# Altium PCB BEAGLEPLAYV020_220915.brd.PcbDoc (part 5 of 12)
Units mil, origin at the board's own origin, x right, y up, seen from the top; angles counter-clockwise.
Board outline 3149.7 x 3149.7 mil, 8 copper layers (TOP, LYR2_GND, LYR3, LAY4_PWR1, LAY5_PWR2, LAY6, LYR7_GND, BOTTOM), stack 60.84 mil thick; 782 components, 546 nets, 2864 pads, 2056 vias.
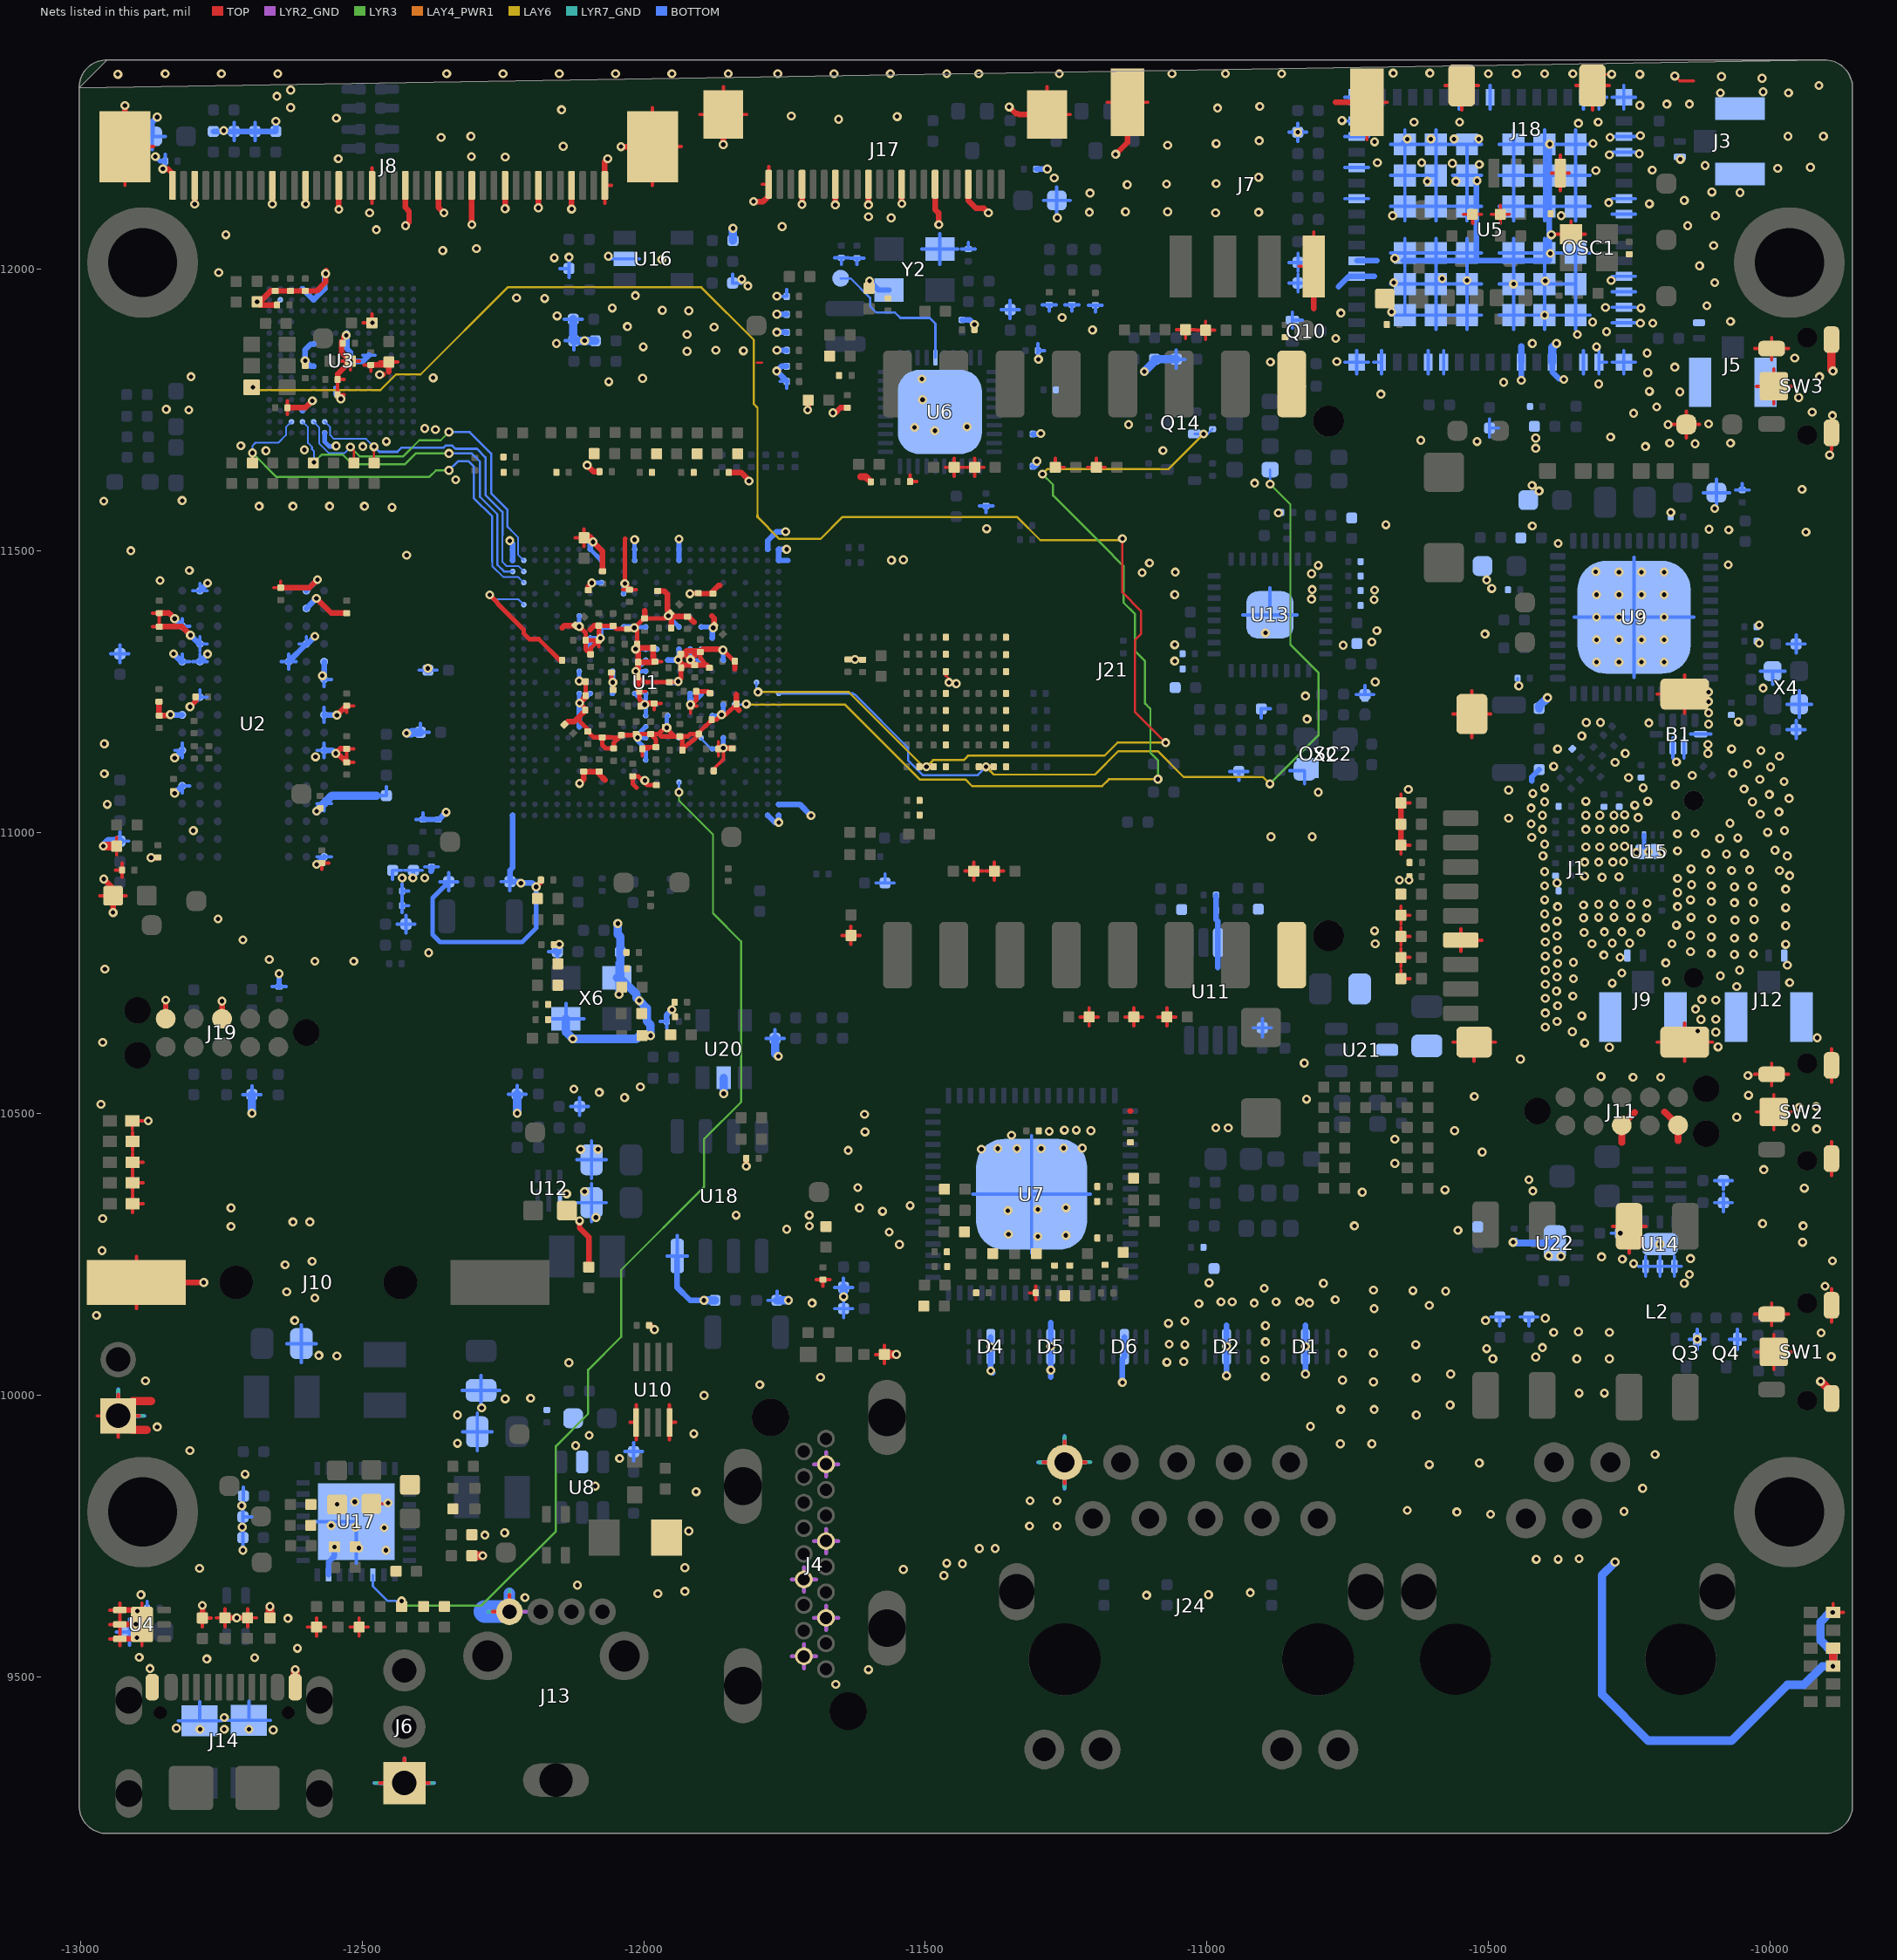
[diagram p11: the nets of this part, all layers, seen from the top]

## Via types
v1: diameter 16/0/16/0/0/0/0/16 (per signal layer), hole 8, TOP to BOTTOM, 334 vias
v2: diameter 16/16/0/0/0/0/16/16 (per signal layer), hole 8, TOP to BOTTOM, 282 vias
v3: diameter 16/0/0/0/0/16/0/16 (per signal layer), hole 8, TOP to BOTTOM, 255 vias
v4: diameter 16/16/0/0/0/16/16/16 (per signal layer), hole 8, TOP to BOTTOM, 253 vias
v5: diameter 16, hole 8, TOP to BOTTOM, 212 vias
v6: diameter 16/16/16/0/0/16/16/16 (per signal layer), hole 8, TOP to BOTTOM, 173 vias
v7: diameter 16/0/0/16/0/0/0/16 (per signal layer), hole 8, TOP to BOTTOM, 131 vias
v8: diameter 16/0/0/0/16/0/0/16 (per signal layer), hole 8, TOP to BOTTOM, 98 vias
v9: diameter 16/16/0/16/0/0/16/16 (per signal layer), hole 8, TOP to BOTTOM, 93 vias
v10: diameter 16/0/16/0/0/16/0/16 (per signal layer), hole 8, TOP to BOTTOM, 87 vias
v11: diameter 16/16/0/16/0/16/16/16 (per signal layer), hole 8, TOP to BOTTOM, 44 vias
v12: diameter 16/16/16/16/0/16/16/16 (per signal layer), hole 8, TOP to BOTTOM, 40 vias
v13: diameter 16/16/16/0/0/0/16/16 (per signal layer), hole 8, TOP to BOTTOM, 19 vias
v14: diameter 16/0/0/16/0/16/0/16 (per signal layer), hole 8, TOP to BOTTOM, 15 vias
v15: diameter 16/0/0/0/16/16/0/16 (per signal layer), hole 8, TOP to BOTTOM, 13 vias
v16: diameter 16/0/16/0/16/0/0/16 (per signal layer), hole 8, TOP to BOTTOM, 3 vias
v17: diameter 16/0/16/16/0/0/0/16 (per signal layer), hole 8, TOP to BOTTOM, 3 vias
v18: diameter 16/16/16/16/0/0/16/16 (per signal layer), hole 8, TOP to BOTTOM, 1 vias

## Nets (pads, with @x,y where several pads share a name; then routed paths per layer and width w, separated by ;. In a path a pad name is that pad's centre, name@x,y a point inside that pad or via, vN(x,y) a via of type N, cw(c..) or ccw(c..) an arc to the next point about the centre after c; other vN are vias at no path point) (continued)
EMMC_D4: R8.2 U1.AB2 U3.B3 | length 810.6
  TOP w4: v1(-12695,11673.7) -12694.86,11673.56 R8.2@-12694.86,11655.79
  LYR3 w3.8: v1(-12695,11673.7) -12652,11630.7 -12381,11630.7 -12369,11642.7 v1(-12346,11642.7)
  BOTTOM w3.2: v1(-12695,11673.7) -12695,11686.3 -12689.5,11691.8 -12649.07,11691.8 -12635.5,11705.37 -12635.5,11719.22 U3.B3@-12625.7,11729.02 ; -12269,11480.7 -12269,11472.7 -12249.46,11453.16 -12222.84,11453.16 U1.AB2@-12213.04,11443.36
  BOTTOM w4: v1(-12346,11642.7) -12330,11658.7 -12311,11658.7 -12302,11649.7 -12302,11593.7 -12269,11560.7 -12269,11480.7
EMMC_D5: R7.2 U1.AC1 U3.B4 | length 631.9
  TOP w4: R7.2@-12586.86,11655.79 v1(-12585.63,11657.02)
  LYR3 w3.8: v1(-12585.63,11657.02) -12574.5,11668.15 -12574.41,11668.15 -12571.76,11670.8 -12535,11670.8 -12517.9,11653.7 -12424,11653.7 -12405,11672.7 v1(-12346,11672.7)
  BOTTOM w3.2: U3.B4@-12606.02,11729.02 -12596.22,11719.22 -12596.22,11691.21 -12589.2,11684.19 -12589.2,11680.21 -12585.63,11676.64 v1(-12585.63,11657.02)
  BOTTOM w4: v1(-12346,11672.7) -12305.5,11672.7 -12291,11658.2 -12291,11595.7 -12260,11564.7 -12260,11474.7 -12248.35,11463.05 U1.AC1@-12232.72,11463.05
EMMC_D6: R6.2 U1.AD2 U3.B5 | length 644.8
  TOP w4: v1(-12521,11684) -12514.86,11677.86 R6.2@-12514.86,11655.79
  LYR3 w3.8: v1(-12521,11684) -12504.7,11667.7 -12427,11667.7 -12398.7,11696 -12360.7,11696 v1(-12346,11710.7)
  BOTTOM w3.2: U3.B5@-12586.33,11729.02 -12576.53,11719.22 -12576.53,11690.78 -12558.75,11673 -12532,11673 v1(-12521,11684) ; -12236,11536.7 -12222.92,11523.62 -12222.92,11492.62 U1.AD2@-12213.04,11482.74
  BOTTOM w4: v1(-12346,11710.7) -12309,11710.7 -12271,11672.7 -12271,11601.7 -12242,11572.7 -12242,11542.7 -12236,11536.7
EMMC_D7: R5.2 U1.AC2 U3.B6 | length 601.8
  TOP w4: v5(-12479,11684.7) -12478.58,11684.28 -12478.58,11678.62 -12478.86,11678.34 R5.2@-12478.86,11655.79
  BOTTOM w3.2: U3.B6@-12566.65,11729.02 -12556.85,11719.22 -12556.85,11705.37 -12550.18,11698.7 -12493,11698.7 v5(-12479,11684.7) ; -12251,11527.7 -12251,11479.7 -12244.15,11472.85 -12222.84,11472.85 U1.AC2@-12213.04,11463.05
  BOTTOM w4: v5(-12479,11684.7) -12469.8,11675.5 -12437.51,11675.5 -12430.01,11683 -12355.5,11683 -12351.8,11686.7 -12340.2,11686.7 -12334.5,11681 -12296.3,11681 -12281,11665.7 -12281,11598.7 -12251,11568.7 -12251,11527.7
EMMC_RSTN: D56.2 R182.2 R199.1 U1.N23 | length 3267.8
  TOP w4: D56.2@-12696.48,11790 v3(-12694,11790) ; R182.2@-11510.9,11116.36 v3(-11498,11116.36) R199.1@-11485.4,11116.36 ; v3(-11150,11521.56) -11150,11426 -11117,11393 -11117,11352 -11128,11341 -11128,11214.2 v3(-11073,11159.2)
  LAY6 w3.8: v3(-12694,11790) -12689.14,11785.14 -12467.86,11785.14 -12440,11813 -12396.31,11813 -12241.61,11967.7 -11897.74,11967.7 -11804.52,11874.48 -11804.52,11760.52 -11798,11754 -11798,11562.7 ; -11697,11249 -11635.68,11249 -11504.03,11117.35 -11499.34,11117.35 -11498.35,11116.36 v3(-11498,11116.36) -11486.2,11128.16 -11431.84,11128.16 -11424,11136 -11181.89,11136 -11158.69,11159.2 v3(-11073,11159.2) ; -11697,11521 -11686,11521 -11647,11560 -11337,11560 -11295.8,11518.8 -11152.76,11518.8 v3(-11150,11521.56)
  LAY6 w4: -11798,11562.7 -11798,11560 -11759,11521 -11697,11521 ; v3(-11797,11249) -11697,11249
  BOTTOM w4: U1.N23@-11799.65,11266.2 -11799.65,11251.65 v3(-11797,11249)
EXTINTN: R160.2 U1.D16 U17.11 | length 1936
  TOP w4: R160.2@-12430,9625.21 v1(-12430,9635)
  LYR3 w3.8: v1(-12430,9635) -12422,9627 -12288,9627 -12156,9759 -12156,9909.96 -12098.6,9967.36 -12098.6,10045.4 -12040,10104 -12040,10223 -11893,10370 -11893,10455 -11827,10521 -11827,10806 -11877,10856 -11877,10996 -11937.44,11056.44 v1(-11937.44,11070.95)
  BOTTOM w4: U17.11@-12481.16,9681.31 -12481.16,9661.16 -12455,9635 v1(-12430,9635) ; v1(-11937.44,11070.95) U1.D16@-11937.44,11089.04
GBE_CLKO: TP8.1 U6.35 | length 270.6
  BOTTOM w4: TP8.1@-11650.32,11983.65 -11632.65,11983.65 -11598,11949 -11598,11934 -11587,11923 -11554,11923 -11544.34,11913.34 -11492.34,11913.34 -11482,11903 U6.35@-11482,11842.88
GBE_INTN: Q14.2 R259.2 U1.L21 | length 1795.8
  LYR3 w3.8: v10(-11292,11636) -11273,11617 -11273,11598.02 -11184.6,11509.62 -11184.6,11509.53 -11148,11472.93 -11148,11408 -11128,11388 -11128,11322.2 -11109.6,11303.8 -11109.6,11228.52 -11102.95,11221.86 -11100.2,11219.11 -11100.2,11141.3 -11086.9,11128 v10(-11086.9,11094.43)
  LAY6 w3.8: -11697,11227 -11643.04,11227 -11509.7,11093.66 -11428.66,11093.66 -11417,11082 -11186,11082 -11173.91,11094.09 -11087.91,11094.09 -11087.57,11094.43 v10(-11086.9,11094.43) ; v10(-11292,11636) -11282.75,11645.25 -11067.75,11645.25 v3(-11005.69,11707.31)
  LAY6 w4: v3(-11818,11227.7) -11817.3,11227 -11697,11227
  BOTTOM w4: U1.L21@-11839.02,11226.83 -11818.87,11226.83 v3(-11818,11227.7) ; Q14.2@-11021.74,11707.31 v3(-11005.69,11707.31) -10998.54,11707.31 R259.2@-10989.85,11716
GBE_RSTN: D32.2 R183.2 R200.1 U1.M25 | length 1654
  TOP w4: R183.2@-11404.96,11116.36 -11397.36,11116.36 -11397.15,11116.15 v3(-11392.15,11116.15) -11388.85,11116.15 -11388.64,11116.36 R200.1@-11378.7,11116.36
  LYR3 w3.8: v10(-10887.96,11086.04) -10802,11172 -10802,11283.57 -10851.6,11333.22 -10851.6,11582.17 v1(-10887.65,11618.22)
  LAY6 w3.8: v3(-11392.15,11116.15) -11388,11112 -11387.64,11112 -11378.1,11102.46 -11198.74,11102.46 -11157.2,11144 -11087,11144 -11041,11098 -10900,11098 v10(-10887.96,11086.04) v10(-10887.96,11086.04)
  BOTTOM w4: U1.M25@-11760.28,11246.52 -11628.52,11246.52 -11626.63,11244.63 -11625.23,11244.63 -11530.66,11150.06 -11530.66,11127.8 -11504.22,11101.36 -11406.94,11101.36 v3(-11392.15,11116.15) ; v1(-10887.65,11618.22) D32.2@-10887.65,11644
GND: B1.2 B1.3 B1.10 C2.2 C3.2 C4.2 C5.2 C6.2 C7.2 C8.2 C9.2 C10.2 C11.2 C16.2 C17.2 C18.2 C20.2 C22.2 C23.2 C24.2 C29.2 C30.2 C31.2 C32.2 C33.2 C34.2 C35.2 C36.2 C37.2 C38.2 C39.2 C40.2 C41.2 C42.2 C43.2 C44.2 C46.2 C47.2 C48.2 C49.2 C50.2 C51.2 C52.2 C53.2 C54.2 C55.2 C56.2 C57.2 C58.2 C59.2 C60.2 C61.2 C62.2 C63.2 C64.2 C65.2 C66.2 C67.2 C68.2 C69.2 C70.2 C71.2 C72.2 C73.2 C74.2 C75.2 C76.2 C77.2 C78.2 C79.2 C80.2 C81.2 C83.2 C84.2 C85.2 C86.2 C87.2 C88.2 C89.2 C90.1 C91.2 C92.2 C93.2 C94.2 C95.2 C96.2 C99.2 C100.2 C101.2 C102.2 C103.2 C104.2 C105.1 C107.2 C108.2 C109.2 C110.2 C111.2 C112.2 C113.2 C114.2 C115.2 C116.2 C117.2 C118.2 C119.2 C120.2 C122.2 C123.2 C124.2 C125.2 C126.2 C127.2 C128.2 C129.2 C130.2 C131.2 C132.2 C133.2 C134.2 C135.2 C136.2 C137.2 C138.2 C139.2 C140.2 C141.2 C142.2 C143.2 C144.2 C145.2 C146.2 C147.2 C148.2 C149.2 C150.2 C151.2 C152.2 C153.2 C154.2 C155.2 C156.2 C157.2 C158.2 C159.2 C160.2 C161.2 C162.2 C163.2 C164.2 C165.2 C166.2 C167.2 C168.2 C169.2 C170.2 C171.2 C172.2 C173.2 C174.2 C175.2 C176.2 C177.2 C178.2 C179.2 C180.2 C181.2 C182.2 C183.2 C184.2 C185.2 C186.2 C187.2 C188.2 C189.2 C190.2 C191.2 C192.2 C193.2 C194.2 C195.2 C196.2 C197.2 C198.2 C199.2 C200.2 C201.2 C202.2 C203.2 C204.2 C205.2 C206.2 C207.2 C208.2 C209.2 C210.2 C211.2 C212.2 C213.2 C214.2 C215.2 C216.2 C217.2 C218.2 C219.2 C220.2 C221.2 C222.2 C223.2 C224.2 C225.2 C226.2 C227.2 C228.2 C229.2 C230.2 C231.2 C232.2 C233.2 C234.2 C235.2 C236.2 C237.2 C238.2 C239.2 C240.2 C241.2 C242.2 C243.2 C244.2 C245.2 C247.2 C248.2 C249.2 C250.2 C251.2 C252.2 C253.2 C254.2 C255.2 C258.2 C259.2 C260.2 C261.2 C262.2 C263.2 C264.2 C265.2 C266.2 C267.2 C268.2 C269.2 C270.2 C271.2 C272.2 C273.2 C274.2 C275.2 C276.2 C294.2 C295.2 C296.2 C297.2 C298.2 C299.2 C300.2 D1.3 D1.8 D2.3 D2.8 D4.3 D4.8 D5.3 D5.8 D6.3 D6.8 D7.1 D8.1 D9.1 D10.1 D13.1 D14.1 D15.1 D16.1 D17.1 D18.1 D19.1 D20.1 D24.1 D25.1 D26.1 D27.1 D28.1 D29.1 D30.1 D31.1 D36.1 D37.1 D38.1 D39.1 D40.1 D41.1 D42.1 D43.1 D44.1 D45.1 D52.1 D73.1 D74.1 J1.6 J1.10 J1.11 J1.12 J1.13 J3.2 J3.3 J4.2 J4.5 J4.8 J4.11 J4.17 J5.2 J5.3 J6.1 J7.4 J7.5 J7.6 J8.1 J8.4 J8.7 J8.10 J8.13 J8.16 J8.19 J8.22 J8.25 J8.28 J8.31 J8.38 J8.40 J8.41 J8.42 J9.2 J9.3 J10.1 J11.3 J11.5 J12.2 J12.3 J13.4 J14.B1 J14.B12 J16.1 J17.1 J17.4 J17.7 J17.10 J17.13 J17.16 J17.19 J17.23 J17.24 J18.1 J18.5 J18.6 J19.3 J19.5 J21.1 J21.16 J24.1 L2.2 L12.1 LED3.2 LED4.2 LED5.2 LED6.2 LED7.2 LED8.2 LED9.2 LED11.2 OSC1.2 OSC2.2 Q3.2 Q4.2 Q10.2 R1.2 R15.2 R17.2 R20.2 R22.2 R28.2 R29.2 R33.2 R38.1 R41.1 R43.1 R45.1 R47.1 R55.2 R56.2 R59.2 R61.1 R66.2 R82.2 R83.2 R85.2 R87.2 R88.1 R89.2 R91.2 R93.2 R94.1 R124.2 R128.2 R129.2 R130.2 R131.2 R141.2 R147.2 R152.2 R153.2 R158.2 R187.2 R188.2 R189.2 R190.2 R191.2 R192.2 R193.2 R194.2 R195.2 R196.2 R197.2 R198.2 R199.2 R200.2 R212.2 R213.2 R215.2 R218.2 R220.2 R240.2 R241.2 R242.2 R243.2 R249.1 R251.2 R253.1 R256.2 R261.2 R272.2 R276.2 R277.2 R278.2 R308.1 R310.1 SW1.1 SW1.S1 SW1.S2 SW1.S3 SW2.1 SW2.S1 SW2.S2 SW2.S3 SW3.1 SW3.S1 SW3.S2 SW3.S3 TP28.1 U1.A1 U1.A24 U1.A25 U1.AA11 U1.AB9 U1.AD1 U1.AD9 U1.AD12 U1.AD16 U1.AD25 U1.AE1 U1.AE8 U1.AE12 U1.AE16 U1.AE24 U1.AE25 U1.B25 U1.F13 U1.G13 U1.G19 U1.H13 U1.H16 U1.H18 U1.H20 U1.J7 U1.J13 U1.K7 U1.K13 U1.K15 U1.K19 U1.L20 U1.M7 U1.M8 U1.M10 U1.M12 U1.M13 U1.M17 U1.M18 U1.N15 U1.P7 U1.P10 U1.P13 U1.R13 U1.R15 U1.R18 U1.R20 U1.T8 U1.T13 U1.T14 U1.T16 U1.T17 U1.T18 U1.U8 U1.U19 U1.V9 U1.V10 U1.V11 U1.V13 U1.V16 U1.V18 U1.W7 U1.Y2 U2.A2 U2.A8 U2.B2 U2.C9 U2.D2 U2.D8 U2.E1 U2.E3 U2.E8 U2.E9 U2.F1 U2.G8 U2.H1 U2.H9 U2.K1 U2.K9 U2.M9 U2.N1 U2.T1 U3.A6 U3.C4 U3.E7 U3.G5 U3.H10 U3.J5 U3.K8 U3.N2 U3.N5 U3.P4 U3.P6 U4.1 U4.2 U4.3 U4.7 U5.1 U5.7 U5.9 U5.15 U5.16 U5.17 U5.19 U5.20 U5.23 U5.24 U5.28 U5.29 U5.30 U5.31 U5.33 U5.34 U5.35 U5.37 U5.39 U5.44 U5.45 U5.48 U5.49 U5.54 U5.55 U5.59 U5.61 U5.63 U5.64 U5.G1 U5.G2 U5.G3 U5.G4 U5.G5 U5.G6 U5.G7 U5.G8 U5.G9 U5.G10 U5.G11 U5.G12 U5.G13 U5.G14 U5.G15 U5.G16 U5.G17 U5.G18 U5.G19 U5.G20 U5.G21 U5.G22 U5.G23 U5.G24 U5.G25 U5.G26 U5.G27 U5.G28 U5.G29 U5.G30 U5.G31 U5.G32 U5.G33 U5.G34 U5.G35 U5.G36 U6.41 U7.65 U8.2 U9.49 U10.1 U10.4 U11.3 U12.4 U13.33 U14.1 U14.2 U14.3 U14.7 U15.6 U15.9 U16.2 U17.15 U17.33 U18.4 U20.2 U21.2 U22.5 U22.7 X2.2 X4.2 X4.4 X6.2 X6.4 Y2.2 Y2.4 | length 33060.3
  TOP w4: C63.2@-12483.66,9807.5 -12459.5,9807.5 -12458,9809 v2(-12454.16,9809) ; -11799,11834 -11789.61,11834 ; -11463.4,11278.4 -11459,11274 -11459,11266.9 v2(-11458.1,11266) ; J18.5@-10300.83,12326.17 -10300.83,12338.17 -10293,12346 v4(-10281,12346) ; v4(-10169,12343) -10160.31,12334.31
  TOP w6: -12970.86,9963.66 J16.1@-12933.34,9963.66 ; -12966.06,10887.36 C109.2@-12942.54,10887.36 -12919.02,10887.36 ; -12948.34,9567.57 U4.3@-12930.51,9567.57 ; -12948.34,9593.16 U4.2@-12930.51,9593.16 ; -12948.34,9618.75 U4.1@-12930.51,9618.75 ; -12937.98,10932.84 C101.2@-12926.46,10932.84 ; -12936.09,10959.49 C80.2@-12936.09,10975.36 -12936.09,10991.23 ; -12933.34,9926.14 J16.1@-12933.34,9963.66 ; -12933.34,10001.18 J16.1@-12933.34,9963.66 ; -12930.51,9555.64 U4.3@-12930.51,9567.57 ; -12930.51,9579.5 U4.3@-12930.51,9567.57 ; -12930.51,9581.23 U4.2@-12930.51,9593.16 ; -12930.51,9605.09 U4.2@-12930.51,9593.16 ; -12930.51,9606.82 U4.1@-12930.51,9618.75 ; -12930.51,9630.68 U4.1@-12930.51,9618.75 ; -12926.46,10920.57 C101.2@-12926.46,10932.84 ; -12926.46,10945.11 C101.2@-12926.46,10932.84 ; -12921.5,12148.44 J8.42@-12921.5,12217.45 -12870.2,12217.45 ; -12908.18,10471.54 LED3.2@-12908.18,10487.56 -12889.66,10487.56 ; -12907.88,10324.54 LED7.2@-12907.88,10340.56 ; -12907.88,10356.58 LED7.2@-12907.88,10340.56 ; -12907.88,10361.54 LED6.2@-12907.88,10377.56 ; -12907.88,10393.58 LED6.2@-12907.88,10377.56 ; -12907.88,10397.84 LED5.2@-12907.88,10413.86 ; -12907.88,10429.88 LED5.2@-12907.88,10413.86 ; -12907.88,10434.84 LED4.2@-12907.88,10450.86 -12907.88,10466.88 ; -12900.99,10154.59 J10.1@-12900.99,10200.61 -12900.99,10246.63 ; -12895.82,9963.66 J16.1@-12933.34,9963.66 ; -12891.14,9555.64 U4.7@-12891.14,9593.16 -12891.14,9630.68 ; -12889.36,10340.56 LED7.2@-12907.88,10340.56 ; -12889.36,10377.56 LED6.2@-12907.88,10377.56 ; -12889.36,10413.86 LED5.2@-12907.88,10413.86 ; -12872.61,11365.2 C81.2@-12860.34,11365.2 -12860.34,11376.72 ; -12872.61,11389.24 C102.2@-12860.34,11389.24 -12860.34,11377.72 ; -12783.86,9588.86 R129.2@-12783.86,9604.73 -12767.99,9604.73 ; -12759.53,9604.93 D25.1@-12743.66,9604.93 ; -12743.66,9589.06 D25.1@-12743.66,9604.93 ; -12743.66,9620.8 D25.1@-12743.66,9604.93 ; -12703.66,9589.1 D24.1@-12703.66,9604.97 ; -12703.66,9620.84 D24.1@-12703.66,9604.97 ; -12687.79,9604.97 D24.1@-12703.66,9604.97 ; -12657.13,11434.32 C114.2@-12644.86,11434.32 -12644.86,11445.84 ; -12632.84,11741.77 C76.2@-12632.84,11754.04 -12632.84,11766.31 ; -12597.01,9588.67 R215.2@-12581.14,9588.67 ; -12581.14,9572.8 R215.2@-12581.14,9588.67 ; -12581.14,9604.54 R215.2@-12581.14,9588.67 ; -12571.66,10933.98 C117.2@-12571.66,10945.5 -12559.39,10945.5 ; -12565.27,9588.67 R215.2@-12581.14,9588.67 ; -12543.72,11789.31 C73.2@-12543.72,11777.04 -12532.2,11777.04 ; -12543.56,11791.77 C68.2@-12543.56,11804.04 -12532.04,11804.04 ; -12536.78,11836.56 v2(-12520.91,11836.56) ; -12534.86,11856.09 C65.2@-12534.86,11868.36 v2@-12534.86,11880.63 ; -12527.66,11135.92 C99.2@-12527.66,11124.4 -12515.39,11124.4 ; -12527.66,11136.88 C120.2@-12527.66,11148.4 -12515.39,11148.4 ; -12527.66,11212.98 C116.2@-12527.66,11224.5 -12515.39,11224.5 ; -12521.37,9588.71 R55.2@-12505.5,9588.71 ; -12520.91,11820.69 v2(-12520.91,11836.56) ; -12505.5,9572.84 R55.2@-12505.5,9588.71 ; -12505.5,9604.58 R55.2@-12505.5,9588.71 ; -12505.04,11836.56 v2(-12520.91,11836.56) ; -12498.62,11904.56 R20.2@-12482.75,11904.56 -12482.75,11920.43 ; -12496.93,11829.88 C66.2@-12484.66,11829.88 -12484.66,11818.36 ; -12489.63,9588.71 R55.2@-12505.5,9588.71 ; -12482.53,12116.94 J8.22@-12482.53,12148.55 -12482.53,12180.16 ; -12468.6,9311.76 J6.1@-12425.08,9311.76 ; -12468.53,11834.99 C69.2@-12452.66,11834.99 -12436.79,11834.99 ; -12425.08,9355.28 J6.1@-12425.08,9311.76 ; -12381.56,9311.76 J6.1@-12425.08,9311.76 ; -12268.32,9616 J13.4@-12238.68,9616 -12238.68,9645.64 ; -12121.87,11522.91 R130.2@-12106,11522.91 ; -12106,11507.04 R130.2@-12106,11522.91 ; -12106,11538.78 R130.2@-12106,11522.91 ; -12091.3,11341.36 C156.2@-12079.78,11341.36 -12079.78,11329.09 ; -12069.14,12116.94 J8.1@-12069.14,12148.55 -12057.21,12148.55 ; -12037.61,11430.85 C208.2@-12025.34,11430.85 -12013.07,11430.85 ; -12024.4,9952.16 U10.1@-12013.38,9952.16 ; -12013.38,9921.14 U10.1@-12013.38,9952.16 ; -12013.38,9983.18 U10.1@-12013.38,9952.16 ; -12007.85,11262.31 C187.2@-12007.85,11250.04 -11996.33,11250.04 ; -12002.3,11135.77 C137.2@-12002.3,11148.04 -11990.78,11148.04 ; -11992.61,11302.85 C176.2@-11980.34,11302.85 ; -11984.5,12148.44 J8.41@-11984.5,12217.45 ; -11984.5,12286.46 J8.41@-11984.5,12217.45 ; -11981.66,11217.36 C162.2@-11981.66,11228.88 -11969.39,11228.88 ; -11980.34,11314.37 C176.2@-11980.34,11302.85 ; -11968.07,11302.85 C176.2@-11980.34,11302.85 ; -11954.38,9921.14 U10.4@-11954.38,9952.16 ; -11954.38,9983.18 U10.4@-11954.38,9952.16 ; -11943.36,9952.16 U10.4@-11954.38,9952.16 ; -11933.2,12217.45 J8.41@-11984.5,12217.45 ; -11916.85,11211.77 C188.2@-11916.85,11224.04 -11905.33,11224.04 ; v2@-11915.61,11424.4 C142.2@-11903.34,11424.4 -11891.07,11424.4 ; -11900.16,12274.63 J17.24@-11858.7,12274.63 ; C154.2@-11875.85,11109.04 -11875.85,11112.34 -11858.7,11129.49 v2(-11858.7,11149.61) ; -11867.3,11135.77 C139.2@-11867.3,11148.04 -11867.3,11160.31 ; -11858.7,12323.96 J17.24@-11858.7,12274.63 ; -11817.24,12274.63 J17.24@-11858.7,12274.63 ; -11789.92,12150.73 J17.1@-11777.99,12150.73 -11777.99,12182.34 ; -11693.93,10205.5 C245.2@-11681.66,10205.5 ; -11681.66,10193.98 C245.2@-11681.66,10205.5 ; -11669.39,10205.5 C245.2@-11681.66,10205.5 ; -11647.87,10816.79 D31.1@-11632,10816.79 ; -11632,10800.92 D31.1@-11632,10816.79 ; -11632,10832.66 D31.1@-11632,10816.79 ; -11616.13,10816.79 D31.1@-11632,10816.79 ; -11588.41,10072.66 D7.1@-11572.54,10072.66 ; -11572.54,10056.79 D7.1@-11572.54,10072.66 ; -11572.54,10088.53 D7.1@-11572.54,10072.66 ; -11527.13,11634.88 C94.2@-11527.13,11622.61 -11515.61,11622.61 ; -11464.45,11648 D36.1@-11448.58,11648 ; -11463.4,11278.4 R189.2@-11463.4,11285.3 ; -11448.58,11632.13 D36.1@-11448.58,11648 ; -11448.58,11663.87 D36.1@-11448.58,11648 ; -11432.71,11648 D36.1@-11448.58,11648 ; -11429.66,10931 D45.1@-11413.79,10931 ; -11428.08,11648 D37.1@-11412.21,11648 ; -11413.79,10915.13 D45.1@-11413.79,10931 ; -11413.79,10946.87 D45.1@-11413.79,10931 ; -11412.21,11632.13 D37.1@-11412.21,11648 ; -11412.21,11663.87 D37.1@-11412.21,11648 ; -11397.92,10931 D45.1@-11413.79,10931 ; -11396.34,11648 D37.1@-11412.21,11648 ; -11393.08,10931 D44.1@-11377.21,10931 ; -11377.21,10915.13 D44.1@-11377.21,10931 ; -11377.21,10946.87 D44.1@-11377.21,10931 ; -11361.34,10931 D44.1@-11377.21,10931 ; -11315.18,10182.06 C248.2@-11303.66,10182.06 ; -11303.66,10169.79 C248.2@-11303.66,10182.06 ; -11303.66,10194.33 C248.2@-11303.66,10182.06 ; -11290.1,9881.2 J24.1@-11252.58,9881.2 ; -11283.9,12323.97 J17.23@-11283.9,12274.64 -11242.44,12274.64 ; -11269.21,11663.87 D38.1@-11269.21,11648 -11253.34,11648 ; -11252.58,9843.68 J24.1@-11252.58,9881.2 ; -11252.58,9918.72 J24.1@-11252.58,9881.2 ; -11224.87,10672 D43.1@-11209,10672 ; -11215.06,9881.2 J24.1@-11252.58,9881.2 ; -11212.08,11648 D39.1@-11196.21,11648 ; -11209,10656.13 D43.1@-11209,10672 ; -11209,10687.87 D43.1@-11209,10672 ; -11196.21,11663.87 D39.1@-11196.21,11648 ; -11193.13,10672 D43.1@-11209,10672 ; -11180.34,11648 D39.1@-11196.21,11648 ; -11176.97,12296.38 J7.6@-11140.95,12296.38 -11104.93,12296.38 ; -11145.45,10672 D42.1@-11129.58,10672 ; -11129.58,10656.13 D42.1@-11129.58,10672 ; -11129.58,10687.87 D42.1@-11129.58,10672 ; -11113.71,10672 D42.1@-11129.58,10672 ; -11086.9,10672 D41.1@-11071.03,10672 ; -11071.03,10656.13 D41.1@-11071.03,10672 ; -11071.03,10687.87 D41.1@-11071.03,10672 ; -11055.16,10672 D41.1@-11071.03,10672 ; -11053.72,11892.47 D20.1@-11037.85,11892.47 ; -11037.85,11876.6 D20.1@-11037.85,11892.47 ; -11021.98,11892.47 D20.1@-11037.85,11892.47 ; -11018.06,11891.53 D19.1@-11002.19,11891.53 ; -11002.19,11875.66 D19.1@-11002.19,11891.53 ; -11002.19,11907.4 D19.1@-11002.19,11891.53 ; -10986.32,11891.53 D19.1@-11002.19,11891.53 ; -10836.26,12005.04 J7.4@-10810.24,12005.04 -10810.24,12066.06 ; -10715.75,12230.36 J7.5@-10715.75,12296.38 -10679.73,12296.38 ; -10655.21,10755.91 D18.1@-10655.21,10740.04 -10639.34,10740.04 ; -10655.21,10761.87 D9.1@-10655.21,10777.74 ; -10655.21,10793.61 D9.1@-10655.21,10777.74 ; -10655.21,10799.17 D13.1@-10655.21,10815.04 ; -10655.21,10830.91 D13.1@-10655.21,10815.04 ; -10655.21,10836.89 D14.1@-10655.21,10852.76 ; -10655.21,10868.63 D14.1@-10655.21,10852.76 ; -10655.21,10961.27 D15.1@-10655.21,10977.14 -10639.34,10977.14 ; -10655.21,11067.91 D17.1@-10655.21,11052.04 -10639.34,11052.04 ; -10639.34,10777.74 D9.1@-10655.21,10777.74 ; -10639.34,10815.04 D13.1@-10655.21,10815.04 ; -10639.34,10852.76 D14.1@-10655.21,10852.76 ; -10577.01,12326.17 J18.6@-10547.37,12326.17 ; -10562.9,10627.29 J1.10@-10525.38,10627.29 ; -10562.89,11209.97 J1.13@-10529.31,11209.97 ; -10549,10788.6 J1.6@-10549,10808.4 ; -10549,10828.2 J1.6@-10549,10808.4 ; -10547.37,12282.75 J18.6@-10547.37,12326.17 ; -10544,12097.34 D30.1@-10528.13,12097.34 ; -10529.31,11168.51 J1.13@-10529.31,11209.97 ; -10529.31,11251.43 J1.13@-10529.31,11209.97 ; -10528.13,12081.47 D30.1@-10528.13,12097.34 ; -10525.38,10593.71 J1.10@-10525.38,10627.29 ; -10517.73,12326.17 J18.6@-10547.37,12326.17 ; -10512.26,12097.34 D30.1@-10528.13,12097.34 ; -10511.48,10808.4 J1.6@-10549,10808.4 ; -10495.73,11209.97 J1.13@-10529.31,11209.97 ; -10494.58,12097.34 D29.1@-10478.71,12097.34 ; -10487.86,10627.29 J1.10@-10525.38,10627.29 ; -10478.71,12081.47 D29.1@-10478.71,12097.34 ; -10478.71,12113.21 D29.1@-10478.71,12097.34 ; -10462.84,12097.34 D29.1@-10478.71,12097.34 ; -10388.04,12170.66 J18.1@-10372.17,12170.66 ; -10379,12061.81 OSC1.2@-10353.29,12061.81 ; -10372.17,12139.05 J18.1@-10372.17,12170.66 ; -10372.17,12202.27 J18.1@-10372.17,12170.66 ; -10356.3,12170.66 J18.1@-10372.17,12170.66 ; -10353.29,12085.55 OSC1.2@-10353.29,12061.81 ; -10344.73,12326.17 J18.5@-10315.09,12326.17 -10315.09,12282.75 ; -10327.58,12061.81 OSC1.2@-10353.29,12061.81 ; J18.5@-10300.83,12326.17 -10285.45,12326.17 ; -10279.64,10300.21 L2.2@-10250,10300.21 ; -10250,10252.85 L2.2@-10250,10300.21 ; -10220.36,10300.21 L2.2@-10250,10300.21 ; -10200.69,10627.29 J1.11@-10151.36,10627.29 ; -10200.69,11245.41 J1.12@-10151.36,11245.41 ; -10172.3,11724.11 TP28.1@-10148.56,11724.11 ; -10160.31,12334.31 -10135.68,12334.31 ; -10151.36,10593.71 J1.11@-10151.36,10627.29 ; -10151.36,10660.87 J1.11@-10151.36,10627.29 ; -10151.36,11211.83 J1.12@-10151.36,11245.41 ; -10151.36,11278.99 J1.12@-10151.36,11245.41 ; -10148.56,11700.37 TP28.1@-10148.56,11724.11 ; -10148.56,11747.85 TP28.1@-10148.56,11724.11 ; -10124.82,11724.11 TP28.1@-10148.56,11724.11 ; -10102.03,10627.29 J1.11@-10151.36,10627.29 ; -10026.63,10144.23 SW1.1@-9996.99,10144.23 ; -10026.63,10570.23 SW2.1@-9996.99,10570.23 ; -10026.63,11858.93 SW3.1@-9996.99,11858.93 ; -10024.08,10077.3 SW1.S2@-9993.06,10077.3 ; -10024.08,10503.3 SW2.S2@-9993.06,10503.3 ; -10024.08,11792 SW3.S2@-9993.06,11792 ; -9996.99,10124.43 SW1.1@-9996.99,10144.23 ; -9996.99,10164.03 SW1.1@-9996.99,10144.23 ; -9996.99,10550.43 SW2.1@-9996.99,10570.23 ; -9996.99,10590.03 SW2.1@-9996.99,10570.23 ; -9996.99,11839.13 SW3.1@-9996.99,11858.93 ; -9996.99,11878.73 SW3.1@-9996.99,11858.93 ; -9993.06,10046.28 SW1.S2@-9993.06,10077.3 ; -9993.06,10108.32 SW1.S2@-9993.06,10077.3 ; -9993.06,10472.28 SW2.S2@-9993.06,10503.3 ; -9993.06,10534.32 SW2.S2@-9993.06,10503.3 ; -9993.06,11760.98 SW3.S2@-9993.06,11792 ; -9993.06,11823.02 SW3.S2@-9993.06,11792 ; -9967.35,10144.23 SW1.1@-9996.99,10144.23 ; -9967.35,10570.23 SW2.1@-9996.99,10570.23 ; -9967.35,11858.93 SW3.1@-9996.99,11858.93 ; -9962.04,10077.3 SW1.S2@-9993.06,10077.3 ; -9962.04,10503.3 SW2.S2@-9993.06,10503.3 ; -9962.04,11792 SW3.S2@-9993.06,11792 ; -9890.69,10130.34 SW1.S1@-9890.69,10159.98 -9890.69,10189.62 ; -9890.69,10390.98 SW2.S3@-9890.69,10420.62 -9890.69,10450.26 ; -9890.69,10556.34 SW2.S1@-9890.69,10585.98 -9890.69,10615.62 ; -9890.69,11679.68 SW3.S3@-9890.69,11709.32 v4@-9890.69,11738.96 ; -9887.76,9630.44 LED11.2@-9887.76,9614.42 -9869.24,9614.42
  TOP w8: v9(-12273.49,11421.51) -12262.88,11410.9 -12259.39,11407.39 -12259.39,11406.09 -12213,11359.7 -12213,11353 -12203,11343 -12186.5,11343 -12148.67,11305.17 C273.2@-12145,11305.17 ; C193.2@-12121.09,11367.16 -12116.46,11367.16 v2(-12114.61,11365.31) -12103.3,11354 C140.2@-12103.3,11341.04 ; -12114.29,11205.72 -12114.29,11197.57 -12099.34,11182.62 C194.2@-12099.34,11178.85 -12089.04,11168.55 C212.2@-12073.66,11168.55 ; v2(-12114,11229.5) -12103.71,11219.21 C228.2@-12103.71,11217.05 ; C227.2@-12103.15,11242.36 C182.2@-12103.15,11267.36 ; C197.2@-12057.48,11283.69 -12057.48,11268.76 v2(-12054.92,11266.2) -12054.34,11265.62 C165.2@-12054.34,11252.52 ; -12033,11521 -12033.7,11520.3 v2(-12033.7,11441.7) -12025.34,11433.34 C208.2@-12025.34,11430.85 ; v2(-12014,11285.88) -12010.85,11282.73 C196.2@-12010.85,11276.04 ; C202.2@-12013.66,11174.55 -12015.66,11172.55 C185.2@-12039.66,11172.55 C185.2@-12043.71,11168.5 ; -12013,11079 -12019.66,11085.66 C221.2@-12019.66,11099.55 -12009.85,11099.55 -12004.3,11094 -12003,11094 -12001,11092 v2(-11997.99,11091.98) -11997.99,11088.99 -11997,11088 -11997,11086.7 -11994,11083.7 C272.2@-11977.47,11083.7 ; C192.2@-12011.85,11334.04 -12011.85,11358.1 v2(-12016.71,11362.96) ; v2(-12011,11168.5) -12004.95,11174.55 C180.2@-11987.66,11174.55 ; C189.2@-12005.85,11224.04 -12001.01,11228.88 v2@-11996.13,11228.88 ; C137.2@-12002.3,11148.04 -11999.14,11151.2 C210.2@-11978.34,11151.2 -11978.34,11165.23 C180.2@-11987.66,11174.55 ; v2(-11998.18,11226.83) -12007.85,11236.5 C187.2@-12007.85,11250.04 -12010.85,11253.04 C196.2@-12010.85,11276.04 ; C220.2@-11952.6,11388.97 -11961.72,11379.85 C198.2@-11998.34,11379.85 -11999.82,11379.85 v2(-12016.71,11362.96) ; C200.2@-11933.85,11292.04 -11933.85,11273.16 v2(-11939.1,11267.91) -11940.16,11266.85 C199.2@-11954.34,11266.85 -12001.66,11266.85 C196.2@-12010.85,11276.04 ; C144.2@-11931.51,11145.87 C144.2@-11931.51,11146.62 ; v2(-11918,11423.7) v2@-11917,11424.7 ; C188.2@-11916.85,11224.04 -11906.85,11234.04 C184.2@-11906.85,11250.04 -11885.53,11250.04 C213.2@-11882.34,11246.85 ; v2@-11916.3,11425.4 v2@-11917,11424.7 ; C142.2@-11903.34,11424.4 -11903.64,11424.7 v2@-11917,11424.7 ; C217.2@-11899.66,11320.16 -11899.66,11309.07 -11895.09,11304.5 -11895.09,11303.47 -11894.84,11303.22 -11894.84,11302.47 -11884.26,11291.89 C218.2@-11883.51,11291.89 ; C139.2@-11867.3,11148.04 -11866.34,11149 v2@-11858.09,11149 ; v2(-11859.4,11323.59) -11859.11,11323.59 -11839.53,11304.01 C141.2@-11838.3,11304.01 ; C211.2@-11835.5,11227.29 -11846.08,11216.71 -11846.83,11216.71 -11854.84,11208.7 v2(-11862,11208.7) -11870.66,11200.04 C143.2@-11879.3,11200.04 -11879.3,11199.29 -11889.88,11188.71 -11890.63,11188.71 -11902.15,11177.19 C219.2@-11902.15,11174.36 ; C140.2@-12103.3,11341.04 C156.2@-12080.1,11341.04 ; C140.2@-12103.3,11341.04 -12103.3,11324.81 C226.2@-12094.34,11315.85 -12094.34,11326.8 C156.2@-12080.1,11341.04 ; C156.2@-12080.1,11341.04 C156.2@-12079.78,11341.36 -12079.66,11341.48 C168.2@-12079.66,11366.88 -12079.33,11366.55 C167.2@-12054.66,11366.55 -12049.03,11360.92 C152.2@-12028.66,11360.92 -12018.75,11360.92 v2(-12016.71,11362.96) ; C212.2@-12073.66,11168.55 -12073.66,11154.92 -12067.59,11148.85 C216.2@-12053.34,11148.85 -12053.34,11158.87 C185.2@-12043.71,11168.5 ; C212.2@-12073.66,11168.55 -12059.41,11168.55 -12059.36,11168.5 C185.2@-12043.71,11168.5 ; C180.2@-11987.66,11174.55 -11973.66,11174.55 ; -11973.66,11174.55 -11973.41,11174.55 -11969.09,11170.23 -11945.34,11170.23 ; -11973.66,11174.55 C183.2@-11961.66,11186.55 -11945.34,11170.23 ; -11945.34,11170.23 C201.2@-11936.17,11170.23 ; C201.2@-11936.17,11170.23 -11931.51,11165.57 C144.2@-11931.51,11146.62 ; C201.2@-11936.17,11170.23 -11921.92,11170.23 -11917.79,11174.36 C219.2@-11902.15,11174.36 ; C144.2@-11931.51,11146.62 -11920.93,11157.2 -11919.31,11157.2 -11913.48,11163.03 -11912.73,11163.03 -11902.15,11173.61 C219.2@-11902.15,11174.36
  TOP w10: v9(-12959,10917) -12942.54,10900.54 C109.2@-12942.54,10887.36 v9(-12942.54,10857.54) ; U4.3@-12930.51,9567.57 -12902.43,9567.57 v2(-12900,9570) ; U4.2@-12930.51,9593.16 -12902.84,9593.16 v2(-12902,9594) ; U4.1@-12930.51,9618.75 -12901.25,9618.75 v2(-12899.5,9617) ; J8.42@-12921.5,12217.45 v4(-12921.5,12290.5) ; J10.1@-12900.99,10200.61 v9(-12781.39,10200.61) ; v9(-12875,10955) C59.2@-12863,10955 ; C115.2@-12861,11232 -12861,11207.82 C100.2@-12860.34,11207.16 -12842.45,11207.16 v9(-12840.72,11208.89) ; C81.2@-12860.34,11365.2 -12820.2,11365.2 v9(-12805,11350) ; C102.2@-12860.34,11389.24 -12842.95,11389.24 v9(-12833.1,11379.39) ; v4(-12854,12178) -12845,12178 -12836.86,12169.86 J8.40@-12836.86,12148.55 ; J19.5@-12849,10669 v9(-12849,10702) ; v9(-12805.87,11222.93) -12796,11232.8 C119.2@-12796,11240.36 ; v2(-12797.49,12115.51) J8.38@-12797.49,12148.55 ; R129.2@-12783.86,9604.73 v2(-12783.86,9627.14) ; J19.3@-12749,10669 v9(-12749,10700) ; D25.1@-12743.66,9604.93 -12723.01,9604.93 v2(-12722.97,9604.97) D24.1@-12703.66,9604.97 ; v2(-12659.69,12115.69) J8.31@-12659.69,12148.55 ; C74.2@-12651.2,11936.36 -12681.03,11936.36 v2(-12686.71,11941.99) -12681.71,11941.99 -12662.32,11961.38 C71.2@-12654.66,11961.38 -12654.62,11961.34 C70.2@-12627.66,11961.34 C72.2@-12601,11961.34 -12580.36,11961.34 -12565,11976.7 v2(-12565,11992) ; C114.2@-12644.86,11434.32 -12615.65,11434.32 -12593.8,11434.31 v9(-12579.55,11448.56) ; C76.2@-12632.84,11754.04 -12600.69,11754.04 v2(-12588.52,11766.21) ; C67.2@-12601.34,11828.18 v2(-12601.34,11837.36) ; v2(-12600.64,12115.69) J8.28@-12600.64,12148.55 ; v9(-12581.3,11415.31) -12555.19,11389.2 C58.2@-12527.66,11389.2 ; v9(-12581.1,10943.01) -12578.61,10945.5 C117.2@-12571.66,10945.5 ; v9(-12581.1,11037.51) -12576.17,11042.44 C123.2@-12574.66,11042.44 ; v9(-12545,11208) -12528.5,11224.5 C116.2@-12527.66,11224.5 ; C73.2@-12543.72,11777.04 -12543.72,11775.42 v2(-12538,11769.7) ; C68.2@-12543.56,11804.04 -12543.56,11813.91 v2(-12520.91,11836.56) -12536.86,11852.51 C65.2@-12536.86,11871.36 ; v2(-12541.58,12106.06) J8.25@-12541.58,12148.55 ; C99.2@-12527.66,11124.4 -12536.16,11132.9 -12536.89,11132.9 -12543.99,11140 v9(-12547,11140) -12538.6,11148.4 C120.2@-12527.66,11148.4 ; C66.2@-12484.66,11829.88 -12457.77,11829.88 C69.2@-12452.66,11834.99 -12452.66,11818.34 -12453,11818 ; R20.2@-12482.75,11904.56 v2(-12482,11904.56) ; v2(-12469,11812.7) v2@-12462.66,11812.7 ; J8.19@-12423.47,12148.55 -12423.47,12109.47 -12416.8,12102.8 -12416.8,12083.2 v2(-12423,12077) ; J8.16@-12364.42,12148.55 -12364.42,12109.42 v2(-12355,12100) ; v2(-12305.36,12079) J8.13@-12305.36,12148.55 ; v2(-12246.31,12107.31) J8.10@-12246.31,12148.55 ; v2(-12191,10903) -12182.62,10911.38 C145.2@-12182.62,10915.36 ; v2(-12187.25,12109) J8.7@-12187.25,12148.55 ; -12145,11363 -12140.84,11367.16 C193.2@-12121.09,11367.16 ; C205.2@-12140.9,11191.3 -12135.5,11196.7 -12123.31,11196.7 -12114.29,11205.72 -12103.71,11216.3 C228.2@-12103.71,11217.05 ; v2(-12128.2,12106.8) J8.4@-12128.2,12148.55 ; v2(-12114.61,11268.62) -12113.35,11267.36 C182.2@-12103.15,11267.36 ; v2(-12114,10310) -12114,10297.4 -12097.66,10281.06 D26.1@-12097.66,10227.89 ; v2(-12114,11086.7) -12106.66,11094.04 C146.2@-12106.66,11107.92 -12106.53,11107.79 C136.2@-12078.98,11107.79 -12078.98,11102.98 -12069,11093 ; v2(-12114,11229.5) -12103.15,11240.35 C227.2@-12103.15,11242.36 ; v9(-12100.5,11651.7) -12089.16,11640.36 C173.2@-12078.62,11640.36 ; C181.2@-12098.34,11429.85 -12098.34,11436.77 v2(-12092.3,11442.81) ; -12095,11360 -12088.12,11366.88 C168.2@-12079.66,11366.88 ; v2(-12090,11515.7) -12073.34,11499.04 C174.2@-12073.34,11463.52 ; J8.1@-12069.14,12148.55 -12069.14,12190.86 v4(-12064,12196) ; v4(-12040.55,12217.45) J8.41@-11984.5,12217.45 ; v2(-12014,11285.88) -12009.85,11290.03 C195.2@-12009.85,11302.04 ; C189.2@-12005.85,11224.04 -12000.97,11224.04 v2(-11998.18,11226.83) -11996.13,11228.88 C162.2@-11981.66,11228.88 ; C198.2@-11998.34,11379.85 -11998.34,11393.66 ; C55.2@-11990.5,10124.34 -11988.34,10124.34 v2(-11981,10117) ; C171.2@-11975.34,11428.52 -11963.82,11428.52 -11958,11422.7 -11958,11394.37 C220.2@-11952.6,11388.97 -11946.48,11382.85 C190.2@-11922.34,11382.85 -11920.85,11382.85 -11911,11373 ; v2(-11956.34,11384.31) -11951.3,11379.27 C149.2@-11951.3,11362.41 ; C142.2@-11903.34,11424.4 -11902.79,11423.85 C223.2@-11877.34,11423.85 -11877.34,11428 -11867.34,11438 -11865,11438 ; C218.2@-11883.51,11291.89 -11888.47,11296.85 C186.2@-11909.34,11296.85 ; -11879,11384 -11875.03,11380.03 C222.2@-11875.03,11367.07 ; C139.2@-11867.3,11148.04 -11860.27,11148.04 v2(-11858.7,11149.61) -11858.09,11149 C138.2@-11842.66,11149 ; v2(-11859.4,11323.59) -11860.71,11324.9 -11894.92,11324.9 C217.2@-11899.66,11320.16 ; v4(-11858.7,12221.3) J17.24@-11858.7,12274.63 ; C148.2@-11848.85,11639.04 -11827.04,11639.04 -11813.14,11625.14 v9(-11813.14,11623.64) ; -11838.3,11290.3 C141.2@-11838.3,11304.01 ; -11835.5,11244.5 C211.2@-11835.5,11228.04 -11835.5,11227.29 -11835.5,11221.5 -11831,11217 ; v2(-11818,10407) C264.2@-11818,10421 ; v2(-11805,12120) -11788,12120 -11777.99,12130.01 J17.1@-11777.99,12150.73 ; v4(-11718.94,12114.94) J17.4@-11718.94,12150.73 ; v2(-11709,11750) -11708,11751 C95.2@-11708,11767.39 ; v4(-11664,11745) -11659.37,11744.98 -11650.35,11754 C107.2@-11638.39,11754 ; v4(-11659.88,12114.12) J17.7@-11659.88,12150.73 ; v4(-11600.83,12114.17) J17.10@-11600.83,12150.73 ; C299.2@-11599.87,11965.96 -11599.87,11978.13 v4(-11599,11979) ; v4(-11541.77,12116.23) J17.13@-11541.77,12150.73 ; J17.16@-11482.72,12150.73 -11482.72,12105.97 -11476,12099.25 v4(-11476,12079) ; J17.19@-11423.66,12150.73 -11423.66,12121.66 -11410,12108 -11396,12108 v4(-11388,12100) ; C295.2@-11412.69,11892.56 v4(-11412.69,11901.69) ; v4(-11351,12288) -11339.33,12276.33 -11335.69,12276.33 -11334,12274.64 J17.23@-11283.9,12274.64 ; v4(-11162,12204) -11140.95,12225.05 J7.6@-11140.95,12296.38 ; -11136.12,10504.84 -11135.68,10505.28 ; -10810.24,11930.27 J7.4@-10810.24,12005.04 ; -10771.38,12296.38 J7.5@-10715.75,12296.38 ; D15.1@-10655.21,10977.14 D16.1@-10655.21,11014.28 D17.1@-10655.21,11052.04 ; v2(-12565,11992) -12565,11996.5 -12564,11997.5 -12564,11993 v2(-12565,11992) ; C195.2@-12009.85,11302.04 -11981.15,11302.04 C176.2@-11980.34,11302.85 -11983.26,11305.77 C159.2@-11983.26,11327.36 -12012.4,11327.36 v2(-12014.5,11325.26) -12009.85,11320.61 C195.2@-12009.85,11302.04 ; C191.2@-11929.53,11316.55 -11923.73,11322.35 -11901.85,11322.35 C217.2@-11899.66,11320.16 ; C191.2@-11929.53,11316.55 -11927.3,11316.55 v2(-11917.1,11306.35) ; C191.2@-11929.53,11316.55 C191.2@-11934.66,11316.55 -11934.66,11310.79 v2(-11939.1,11306.35) -11933.85,11301.1 C200.2@-11933.85,11292.04 -11929.04,11296.85 C186.2@-11909.34,11296.85 ; v2(-11917.1,11306.35) -11903.29,11320.16 C217.2@-11899.66,11320.16 ; v2(-11917.1,11306.35) -11909.34,11298.59 C186.2@-11909.34,11296.85
  TOP w12: -11615,11631.41 -11605.89,11631.41 C93.2@-11596.87,11622.39 ; -10263.16,10449.16 J11.3@-10263.16,10479.56 -10240,10502.72 ; -10187,10503.4 J11.5@-10163.16,10479.56 -10163.16,10452.16
  TOP w15: v9(-12959.66,10975.36) C80.2@-12936.09,10975.36 ; -12883,9939 -12908.68,9939 J16.1@-12933.34,9963.66 -12907,9990 -12875,9990 ; R128.2@-12663.86,9605.13 v2(-12663.86,9625) ; J14.B1@-12619.02,9481.97 v2(-12619.02,9512.98) ; C113.2@-12305.23,9715.34 v2(-12286,9715.34) ; R130.2@-12106,11522.91 -12097.21,11522.91 v2(-12090,11515.7) ; C178.2@-12002.99,10639.04 v2(-11988,10639.04) ; D7.1@-11572.54,10072.66 v9(-11551.34,10072.66) ; v4(-9910,10025) -9890.69,10005.69 SW1.S3@-9890.69,9994.62 ; SW3.S1@-9890.69,11874.68 -9890.69,11821.69 v4(-9888,11819) ; v2(-9888.58,9614.42) LED11.2@-9887.76,9614.42 ; LED8.2@-9887.76,9519.5 LED9.2@-9887.76,9551.14
  LYR2_GND w7: -12933.34,10001.18 J16.1@-12933.34,9963.66 -12895.82,9963.66 ; -12468.6,9311.76 J6.1@-12425.08,9311.76 ; -12425.08,9355.28 J6.1@-12425.08,9311.76 ; -12381.56,9311.76 J6.1@-12425.08,9311.76 ; -12268.32,9616 J13.4@-12238.68,9616 ; -12238.68,9645.64 J13.4@-12238.68,9616 ; -12209.04,9616 J13.4@-12238.68,9616 ; -11737.47,9536.72 J4.2@-11715.7,9536.72 ; -11737.47,9673.14 J4.8@-11715.7,9673.14 ; -11715.7,9514.95 J4.2@-11715.7,9536.72 ; -11715.7,9558.49 J4.2@-11715.7,9536.72 ; -11715.7,9651.37 J4.8@-11715.7,9673.14 ; -11715.7,9694.91 J4.8@-11715.7,9673.14 ; -11698.09,9604.91 J4.5@-11676.32,9604.91 ; -11698.09,9741.33 J4.11@-11676.32,9741.33 ; -11698.09,9877.74 J4.17@-11676.32,9877.74 ; -11693.93,9536.72 J4.2@-11715.7,9536.72 ; -11693.93,9673.14 J4.8@-11715.7,9673.14 ; -11676.32,9583.14 J4.5@-11676.32,9604.91 ; -11676.32,9626.68 J4.5@-11676.32,9604.91 ; -11676.32,9719.56 J4.11@-11676.32,9741.33 ; -11676.32,9763.1 J4.11@-11676.32,9741.33 ; -11676.32,9855.97 J4.17@-11676.32,9877.74 ; -11676.32,9899.51 J4.17@-11676.32,9877.74 ; -11654.55,9604.91 J4.5@-11676.32,9604.91 ; -11654.55,9741.33 J4.11@-11676.32,9741.33 ; -11654.55,9877.74 J4.17@-11676.32,9877.74 ; -11290.1,9881.2 J24.1@-11252.58,9881.2 ; -11252.58,9843.68 J24.1@-11252.58,9881.2 ; -11252.58,9918.72 J24.1@-11252.58,9881.2 ; -11215.06,9881.2 J24.1@-11252.58,9881.2
  LAY4_PWR1 w5: -12933.34,10001.18 J16.1@-12933.34,9963.66 -12895.82,9963.66
  LAY6 w3.8: -11290.1,9881.2 J24.1@-11252.58,9881.2 ; -11252.58,9843.68 J24.1@-11252.58,9881.2 ; -11252.58,9918.72 J24.1@-11252.58,9881.2 ; -11215.06,9881.2 J24.1@-11252.58,9881.2
  LYR7_GND w7: -12933.34,10009.18 J16.1@-12933.34,9963.66 -12887.82,9963.66 ; -12476.6,9311.76 J6.1@-12425.08,9311.76 -12373.56,9311.76 ; -12276.32,9616 J13.4@-12238.68,9616 -12238.68,9653.64 ; -11298.1,9881.2 J24.1@-11252.58,9881.2 ; -11252.58,9835.68 J24.1@-11252.58,9881.2 ; -11252.58,9926.72 J24.1@-11252.58,9881.2 ; -11207.06,9881.2 J24.1@-11252.58,9881.2
  BOTTOM w3.2: v2(-12686.71,11941.99) -12680.39,11935.67 -12655.28,11935.67 U3.N2@-12645.39,11945.56 ; v9(-12273.49,11421.51) -12270,11418.02 -12270,11417 -12266.8,11413.8 -12222.84,11413.8 U1.Y2@-12213.04,11404
  BOTTOM w4: U1.H18@-11898.08,11167.78 -11898.08,11166.24 -11879.93,11148.09 U1.G19@-11878.39,11148.09 ; C39.2@-10448.12,11273.56 -10448.12,11262.12 v2(-10446,11260) ; v2(-10098,11575) -10095,11578 v2@-10095,11579.48

## Text inside footprints (layer, text, board x,y; h text height)
B1: PIN_NUMBER "6" at -10202.01,11198.95 h25 r180; PIN_NUMBER "8" at -10162.64,11198.95 h25 r180; PIN_NUMBER "9" at -10142.95,11198.95 h25 r180; PIN_NUMBER "1" at -10142.95,11149.73 h25; PIN_NUMBER "4" at -10202.01,11149.73 h25; PIN_NUMBER "7" at -10182.32,11198.95 h25 r180; PIN_NUMBER "5" at -10211.85,11174.34 h25 r270; PIN_NUMBER "3" at -10182.32,11149.73 h25; PIN_NUMBER "10" at -10143.11,11174.34 h25 r90; PIN_NUMBER "2" at -10162.64,11149.73 h25; ASSEMBLY_TOP "0900PC15A0036E" at -10157.48,11164.34 h25 r90
C1: PIN_NUMBER "2" at -10767.14,11245.11 h25 r90; PIN_NUMBER "1" at -10767.14,11208.69 h25 r90; ASSEMBLY_TOP "22pF" at -10767.14,11231.9 h25 r90
C2: PIN_NUMBER "1" at -10876.87,11219.14 h25 r180; PIN_NUMBER "2" at -10913.29,11219.14 h25 r180; ASSEMBLY_TOP "22pF" at -10890.08,11209.14 h25 r180
C3: PIN_NUMBER "1" at -10758.8,11402.66 h25; PIN_NUMBER "2" at -10736.8,11402.66 h25; ASSEMBLY_TOP "10nF" at -10747.8,11412.66 h25
C4: PIN_NUMBER "1" at -10758.8,11429.14 h25; PIN_NUMBER "2" at -10736.8,11429.14 h25; ASSEMBLY_TOP "100nF" at -10747.8,11439.14 h25
C5: PIN_NUMBER "1" at -10743.34,11371.49 h25 r270; PIN_NUMBER "2" at -10743.34,11335.07 h25 r270; ASSEMBLY_TOP "1uF" at -10723.34,11348.28 h25 r270
C6: PIN_NUMBER "1" at -11031,11290 h25 r180; PIN_NUMBER "2" at -11053,11290 h25 r180; ASSEMBLY_TOP "10nF" at -11022,11280 h25 r180
C7: PIN_NUMBER "1" at -11031,11317 h25 r180; PIN_NUMBER "2" at -11053,11317 h25 r180; ASSEMBLY_TOP "100nF" at -11022,11307 h25 r180
C8: PIN_NUMBER "1" at -11029.79,11257 h25 r180; PIN_NUMBER "2" at -11066.21,11257 h25 r180; ASSEMBLY_TOP "1uF" at -11043,11247 h25 r180
C9: PIN_NUMBER "1" at -10758.8,11480.66 h25; PIN_NUMBER "2" at -10736.8,11480.66 h25; ASSEMBLY_TOP "10nF" at -10747.8,11490.66 h25
C10: PIN_NUMBER "1" at -10758.8,11454.95 h25; PIN_NUMBER "2" at -10736.8,11454.95 h25; ASSEMBLY_TOP "100nF" at -10747.8,11464.95 h25
C11: PIN_NUMBER "1" at -10752.66,11521.79 h25 r90; PIN_NUMBER "2" at -10752.66,11558.21 h25 r90; ASSEMBLY_TOP "1uF" at -10752.66,11545 h25 r90
C12: PIN_NUMBER "1" at -10765.14,10475.97 h25 r270; PIN_NUMBER "2" at -10765.14,10439.55 h25 r270; ASSEMBLY_TOP "220nF" at -10765.14,10452.76 h25 r270
C13: PIN_NUMBER "1" at -10802.14,10475.97 h25 r270; PIN_NUMBER "2" at -10802.14,10439.55 h25 r270; ASSEMBLY_TOP "220nF" at -10802.14,10452.76 h25 r270
C14: PIN_NUMBER "1" at -10654.14,10475.97 h25 r270; PIN_NUMBER "2" at -10654.14,10439.55 h25 r270; ASSEMBLY_TOP "4.7nF" at -10654.14,10452.76 h25 r270
C15: PIN_NUMBER "1" at -10617.14,10475.97 h25 r270; PIN_NUMBER "2" at -10617.14,10439.55 h25 r270; ASSEMBLY_TOP "4.7nF" at -10617.14,10452.76 h25 r270
C16: PIN_NUMBER "2" at -10489.67,10139.35 h25 r90; PIN_NUMBER "1" at -10489.67,10102.93 h25 r90; ASSEMBLY_TOP "100pF" at -10489.67,10126.14 h25 r90
C17: PIN_NUMBER "2" at -10438.01,10139.35 h25 r90; PIN_NUMBER "1" at -10438.01,10102.93 h25 r90; ASSEMBLY_TOP "100pF" at -10438.01,10126.14 h25 r90
C18: PIN_NUMBER "1" at -10238.64,11119.05 h25 r270; PIN_NUMBER "2" at -10238.64,11097.05 h25 r270; ASSEMBLY_TOP "100pF" at -10218.64,11118.05 h25 r270
C19: PIN_NUMBER "1" at -10202.01,11118.73 h25 r270; PIN_NUMBER "2" at -10202.01,11096.73 h25 r270; ASSEMBLY_TOP "100pF" at -10182.01,11117.73 h25 r270
C20: PIN_NUMBER "1" at -10059,11585.8 h25 r90; PIN_NUMBER "2" at -10059,11607.8 h25 r90; ASSEMBLY_TOP "100nF" at -10059,11586.8 h25 r90
C21: PIN_NUMBER "2" at -10202.01,10861 h25 r270; PIN_NUMBER "1" at -10202.01,10883 h25 r270; ASSEMBLY_TOP "100pF" at -10182.01,10882 h25 r270
C22: PIN_NUMBER "1" at -10277.57,11067.46 h25 r270; PIN_NUMBER "2" at -10277.57,11045.46 h25 r270; ASSEMBLY_TOP "100pF" at -10257.57,11066.46 h25 r270
C23: PIN_NUMBER "1" at -10304.52,11067.27 h25 r270; PIN_NUMBER "2" at -10304.52,11045.27 h25 r270; ASSEMBLY_TOP "10nF" at -10284.52,11066.27 h25 r270
C24: PIN_NUMBER "2" at -10439.3,11589.7 h25 r180; PIN_NUMBER "1" at -10379.3,11589.7 h25 r180; ASSEMBLY_TOP "22uF" at -10399.3,11579.7 h25 r180
C25: PIN_NUMBER "1" at -10249.57,10896 h25 r180; PIN_NUMBER "2" at -10271.57,10896 h25 r180; ASSEMBLY_TOP "100pF" at -10240.57,10886 h25 r180
C26: PIN_NUMBER "2" at -10363.09,11077.67 h25 r225; PIN_NUMBER "1" at -10347.53,11093.23 h25 r225; ASSEMBLY_TOP "2.4pF" at -10331.17,11085.45 h25 r225
C27: PIN_NUMBER "2" at -10363.09,10998 h25 r270; PIN_NUMBER "1" at -10363.09,11020 h25 r270; ASSEMBLY_TOP "0.8pF" at -10343.09,11019 h25 r270
C28: PIN_NUMBER "2" at -10385.09,10970.99 h25 r180; PIN_NUMBER "1" at -10363.09,10970.99 h25 r180; ASSEMBLY_TOP "3pF" at -10354.09,10960.99 h25 r180